# Altium PCB FinalPCB.PcbDoc (part 2 of 4)
Units mm, origin at the board's own origin, x right, y up, seen from the top; angles counter-clockwise.
Board outline 693.67 x 556.39 mm, 2 copper layers (Top Layer, Bottom Layer); 54 components, 53 nets, 276 pads, 0 vias.
Unrouted connection lines stored in the file: 5.
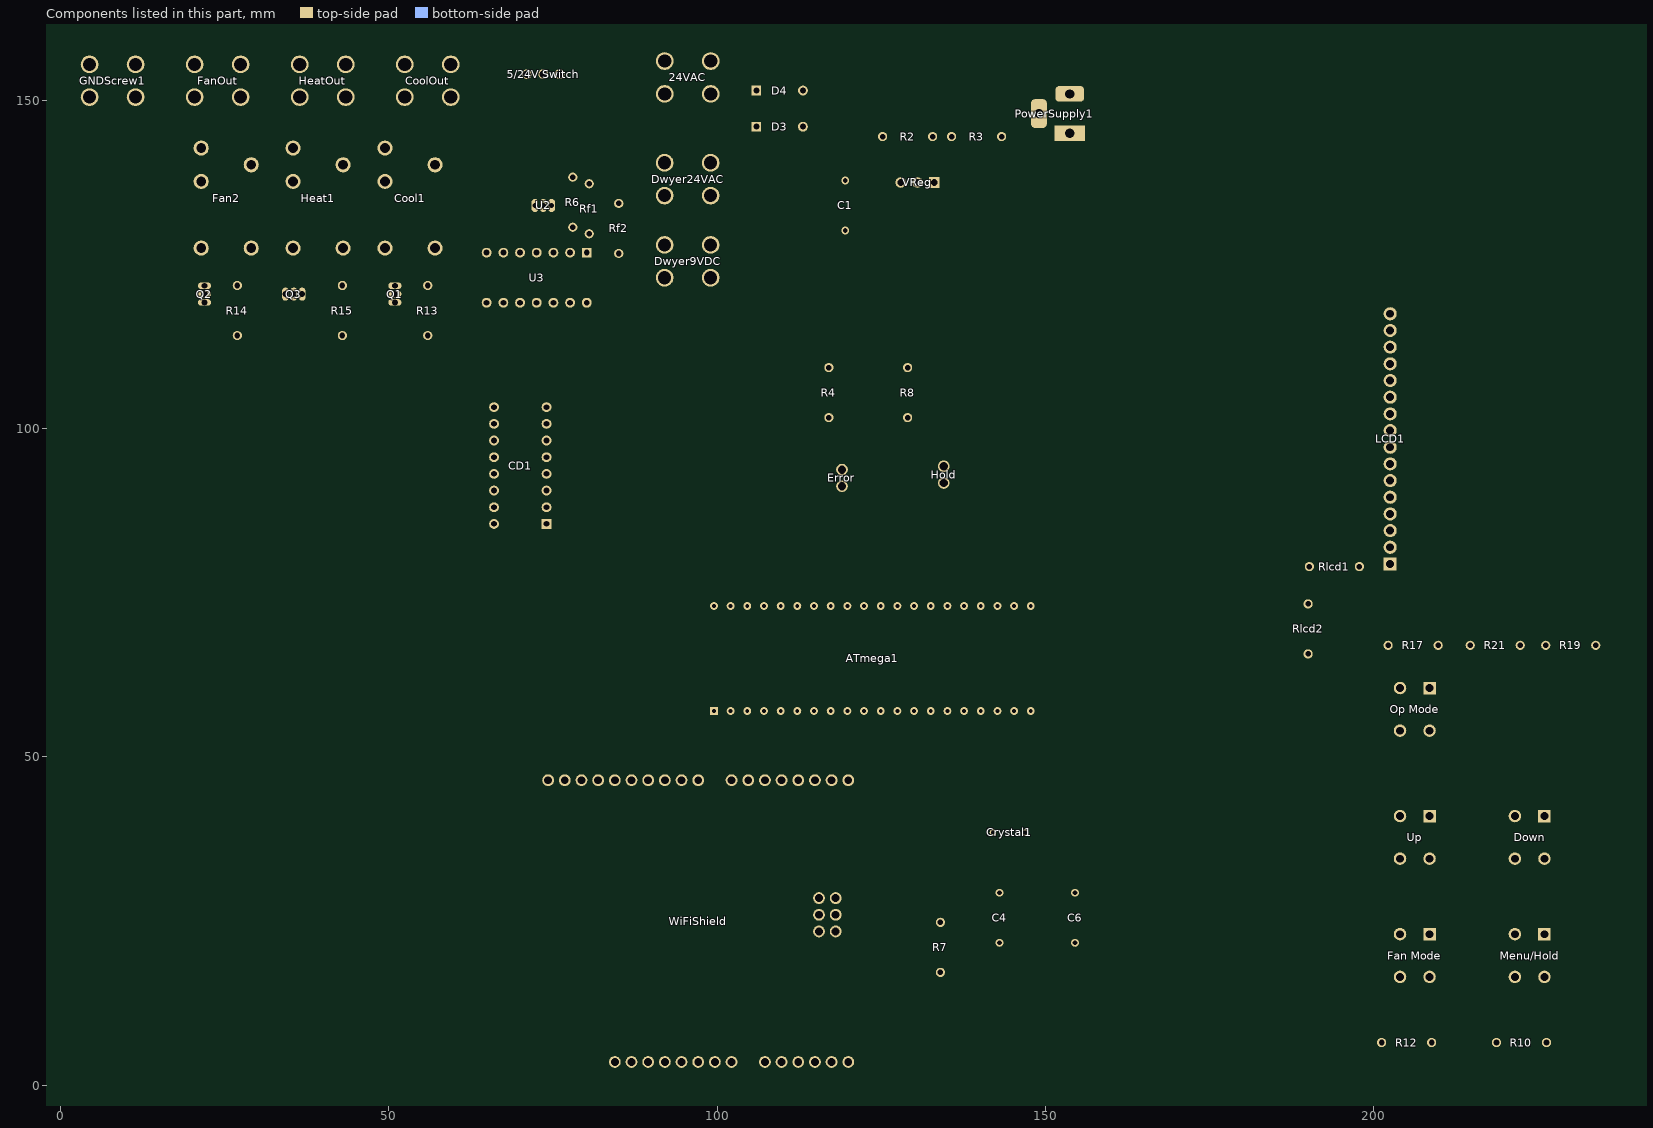
[diagram p2: the components of this part, seen from the top]

## Nets (pads, with @x,y where several pads share a name; then routed paths per layer and width w, separated by ;. In a path a pad name is that pad's centre, name@x,y a point inside that pad or via, vN(x,y) a via of type N, cw(c..) or ccw(c..) an arc to the next point about the centre after c; other vN are vias at no path point) (continued)
copper on no net: (continued)
  Top Layer w0.025: 148.793,113.624 148.793,116.215 ; 148.818,113.624 148.818,116.215 ; 148.843,113.624 148.843,116.215 ; 148.869,113.624 148.869,116.215 ; 148.894,113.624 148.894,116.215 ; 148.92,113.624 148.92,116.215 ; 148.945,113.624 148.945,116.215 ; 148.97,113.624 148.97,116.215 ; 148.996,113.624 148.996,116.215 ; 149.021,113.624 149.021,116.215 ; 149.047,113.624 149.047,116.215 ; 149.072,113.624 149.072,116.215 ; 149.097,113.624 149.097,116.215 ; 149.123,113.624 149.123,116.215 ; 149.123,130.109 149.123,130.414 ; 149.148,113.624 149.148,116.215 ; 149.148,130.109 149.148,130.414 ; 149.174,113.624 149.174,116.215 ; 149.174,130.109 149.174,130.414 ; 149.199,113.624 149.199,116.215 ; 149.199,130.109 149.199,130.414 ; 149.224,113.624 149.224,116.215 ; 149.224,130.109 149.224,130.414 ; 149.25,113.624 149.25,116.215 ; 149.25,130.109 149.25,130.414 ; 149.275,113.624 149.275,116.215 ; 149.275,130.109 149.275,130.414 ; 149.301,113.624 149.301,116.215 ; 149.301,130.109 149.301,130.414 ; 149.326,113.624 149.326,116.215 ; 149.326,130.109 149.326,130.414 ; 149.351,113.624 149.351,116.215 ; 149.351,130.109 149.351,130.414 ; 149.377,113.624 149.377,116.215 ; 149.377,130.109 149.377,130.414 ; 149.402,113.624 149.402,116.215 ; 149.402,130.109 149.402,130.414 ; 149.428,113.624 149.428,116.215 ; 149.428,130.109 149.428,130.414 ; 149.453,113.624 149.453,116.215 ; 149.453,130.109 149.453,130.414 ; 149.478,113.624 149.478,116.215 ; 149.478,130.109 149.478,130.414 ; 149.504,113.624 149.504,116.215 ; 149.504,130.109 149.504,130.414 ; 149.529,113.624 149.529,116.215 ; 149.529,120.482 149.529,120.889 ; 149.529,121.879 149.529,122.565 ; 149.529,124.749 149.529,125.359 ; 149.529,130.109 149.529,130.82 ; 149.555,113.624 149.555,116.215 ; 149.555,120.482 149.555,120.889 ; 149.555,121.879 149.555,122.565 ; 149.555,124.749 149.555,125.359 ; 149.555,130.109 149.555,130.82 ; 149.58,113.624 149.58,116.215 ; 149.58,120.482 149.58,120.889 ; 149.58,121.879 149.58,122.565 ; 149.58,124.749 149.58,125.359 ; 149.58,130.109 149.58,130.82 ; 149.605,113.624 149.605,116.215 ; 149.605,120.482 149.605,120.889 ; 149.605,121.879 149.605,122.565 ; 149.605,124.749 149.605,125.359 ; 149.605,130.109 149.605,130.82 ; 149.631,113.624 149.631,116.215 ; 149.631,120.482 149.631,120.889 ; 149.631,121.879 149.631,122.565 ; 149.631,124.749 149.631,125.359 ; 149.631,130.109 149.631,130.82 ; 149.656,113.624 149.656,114.513 ; 149.656,115.326 149.656,116.215 ; 149.656,120.482 149.656,120.889 ; 149.656,121.879 149.656,122.565 ; 149.656,124.749 149.656,125.359 ; 149.656,125.74 149.656,126.248 ; 149.656,130.109 149.656,130.82 ; 149.682,113.624 149.682,114.513 ; 149.682,115.326 149.682,116.215 ; 149.682,120.482 149.682,120.889 ; 149.682,121.879 149.682,122.565 ; 149.682,124.749 149.682,125.359 ; 149.682,125.74 149.682,126.248 ; 149.682,130.109 149.682,130.82 ; 149.707,113.624 149.707,114.513 ; 149.707,115.326 149.707,116.215 ; 149.707,120.482 149.707,120.889 ; 149.707,121.879 149.707,122.565 ; 149.707,124.749 149.707,125.359 ; 149.707,125.74 149.707,126.248 ; 149.707,130.109 149.707,130.82 ; 149.732,113.624 149.732,114.513 ; 149.732,115.326 149.732,116.215 ; 149.732,120.482 149.732,120.889 ; 149.732,121.879 149.732,122.565 ; 149.732,124.749 149.732,125.359 ; 149.732,125.74 149.732,126.248 ; 149.732,130.109 149.732,130.82 ; 149.758,113.624 149.758,114.513 ; 149.758,115.326 149.758,116.215 ; 149.758,120.482 149.758,120.889 ; 149.758,121.879 149.758,122.565 ; 149.758,124.749 149.758,125.359 ; 149.758,125.74 149.758,126.248 ; 149.758,130.109 149.758,130.82 ; 149.783,113.624 149.783,114.513 ; 149.783,115.326 149.783,116.215 ; 149.783,120.482 149.783,120.889 ; 149.783,121.879 149.783,122.565 ; 149.783,124.749 149.783,125.359 ; 149.783,125.74 149.783,126.248 ; 149.783,130.109 149.783,130.82 ; 149.809,113.624 149.809,114.513 ; 149.809,115.326 149.809,116.215 ; 149.809,120.482 149.809,120.889 ; 149.809,121.879 149.809,122.565 ; 149.809,124.749 149.809,125.359 ; 149.809,125.74 149.809,126.248 ; 149.809,130.109 149.809,130.82 ; 149.834,113.624 149.834,114.513 ; 149.834,115.326 149.834,116.215 ; 149.834,120.482 149.834,120.889 ; 149.834,121.879 149.834,122.565 ; 149.834,124.749 149.834,125.359 ; 149.834,125.74 149.834,126.248 ; 149.834,130.109 149.834,130.82 ; 149.859,113.624 149.859,114.513 ; 149.859,115.326 149.859,116.215 ; 149.859,120.482 149.859,120.889 ; 149.859,121.879 149.859,122.565 ; 149.859,124.749 149.859,125.359 ; 149.859,125.74 149.859,126.248 ; 149.859,130.109 149.859,130.82 ; 149.885,113.624 149.885,114.513 ; 149.885,115.326 149.885,116.215 ; 149.885,120.482 149.885,120.889 ; 149.885,121.879 149.885,122.565 ; 149.885,124.749 149.885,125.359 ; 149.885,125.74 149.885,126.248 ; 149.885,130.109 149.885,130.82 ; 149.91,113.624 149.91,114.513 ; 149.91,115.326 149.91,116.215 ; 149.91,120.482 149.91,120.889 ; 149.91,121.879 149.91,122.565 ; 149.91,124.749 149.91,125.359 ; 149.91,125.74 149.91,126.248 ; 149.91,130.109 149.91,130.82 ; 149.936,113.624 149.936,114.513 ; 149.936,115.326 149.936,116.215 ; 149.936,120.482 149.936,120.889 ; 149.936,121.879 149.936,122.565 ; 149.936,124.749 149.936,125.359 ; 149.936,125.74 149.936,126.248 ; 149.936,130.109 149.936,130.82 ; 149.961,113.624 149.961,114.513 ; 149.961,115.326 149.961,116.215 ; 149.961,120.482 149.961,120.889 ; 149.961,121.879 149.961,122.565 ; 149.961,124.749 149.961,125.359 ; 149.961,125.74 149.961,126.248 ; 149.961,130.109 149.961,130.82 ; 149.986,113.624 149.986,114.513 ; 149.986,115.326 149.986,116.215 ; 149.986,120.482 149.986,120.889 ; 149.986,121.879 149.986,122.565 ; 149.986,124.749 149.986,125.359 ; 149.986,125.74 149.986,126.248 ; 149.986,130.109 149.986,130.82 ; 150.012,113.624 150.012,114.513 ; 150.012,115.326 150.012,116.215 ; 150.012,120.482 150.012,120.889 ; 150.012,121.879 150.012,122.565 ; 150.012,124.749 150.012,125.359 ; 150.012,125.74 150.012,126.248 ; 150.012,130.109 150.012,130.82 ; 150.037,113.624 150.037,114.513 ; 150.037,115.326 150.037,116.215 ; 150.037,120.482 150.037,120.889 ; 150.037,121.879 150.037,122.565 ; 150.037,124.749 150.037,125.359 ; 150.037,125.74 150.037,126.248 ; 150.037,130.109 150.037,130.82 ; 150.063,113.624 150.063,114.513 ; 150.063,115.326 150.063,116.215 ; 150.063,120.482 150.063,120.889 ; 150.063,121.879 150.063,122.565 ; 150.063,124.749 150.063,125.359 ; 150.063,125.74 150.063,126.248 ; 150.063,130.109 150.063,130.82 ; 150.088,113.624 150.088,114.513 ; 150.088,115.326 150.088,116.215 ; 150.088,120.482 150.088,120.889 ; 150.088,121.879 150.088,122.565 ; 150.088,124.749 150.088,125.359 ; 150.088,125.74 150.088,126.248 ; 150.088,130.109 150.088,130.82 ; 150.113,113.624 150.113,114.513 ; 150.113,115.326 150.113,116.215 ; 150.113,120.482 150.113,120.889 ; 150.113,121.879 150.113,122.565 ; 150.113,124.749 150.113,125.359 ; 150.113,125.74 150.113,126.248 ; 150.113,130.109 150.113,130.82 ; 150.139,113.624 150.139,114.513 ; 150.139,115.326 150.139,116.215 ; 150.139,120.482 150.139,120.889 ; 150.139,121.879 150.139,122.565 ; 150.139,124.749 150.139,125.359 ; 150.139,125.74 150.139,126.248 ; 150.139,130.109 150.139,130.82 ; 150.164,113.624 150.164,114.513 ; 150.164,115.326 150.164,116.215 ; 150.164,120.482 150.164,120.889 ; 150.164,121.879 150.164,122.565 ; 150.164,124.749 150.164,125.359 ; 150.164,125.74 150.164,126.248 ; 150.164,130.109 150.164,130.82 ; 150.19,113.624 150.19,114.513 ; 150.19,115.326 150.19,116.215 ; 150.19,120.482 150.19,120.889 ; 150.19,121.879 150.19,122.565 ; 150.19,125.74 150.19,126.248 ; 150.19,130.109 150.19,130.82 ; 150.215,113.624 150.215,114.513 ; 150.215,115.326 150.215,116.215 ; 150.215,120.482 150.215,120.889 ; 150.215,121.879 150.215,122.565 ; 150.215,125.74 150.215,126.248 ; 150.215,130.109 150.215,130.82 ; 150.24,113.624 150.24,114.513 ; 150.24,115.326 150.24,116.215 ; 150.24,120.482 150.24,120.889 ; 150.24,121.879 150.24,122.565 ; 150.24,125.74 150.24,126.248 ; 150.24,130.109 150.24,130.82 ; 150.266,113.624 150.266,114.513 ; 150.266,115.326 150.266,116.215 ; 150.266,120.482 150.266,120.889 ; 150.266,121.879 150.266,122.565 ; 150.266,125.74 150.266,126.248 ; 150.266,130.109 150.266,130.82 ; 150.291,113.624 150.291,114.513 ; 150.291,115.326 150.291,116.215 ; 150.291,120.482 150.291,120.889 ; 150.291,121.879 150.291,122.565 ; 150.291,125.74 150.291,126.248 ; 150.291,130.109 150.291,130.82 ; 150.317,113.624 150.317,114.513 ; 150.317,115.326 150.317,116.215 ; 150.317,120.482 150.317,120.889 ; 150.317,121.879 150.317,122.565 ; 150.317,125.74 150.317,126.248 ; 150.317,130.109 150.317,130.82 ; 150.342,113.624 150.342,114.513 ; 150.342,115.326 150.342,116.215 ; 150.342,120.482 150.342,120.889 ; 150.342,121.879 150.342,122.565 ; 150.342,125.74 150.342,126.248 ; 150.342,130.109 150.342,130.82 ; 150.367,113.624 150.367,114.513 ; 150.367,115.326 150.367,116.215 ; 150.367,120.482 150.367,120.889 ; 150.367,121.879 150.367,122.565 ; 150.367,125.74 150.367,126.248 ; 150.367,130.109 150.367,130.82 ; 150.393,113.624 150.393,114.513 ; 150.393,115.326 150.393,116.215 ; 150.393,120.482 150.393,120.889 ; 150.393,121.879 150.393,122.565 ; 150.393,125.74 150.393,126.248 ; 150.393,130.109 150.393,130.82 ; 150.418,113.624 150.418,114.513 ; 150.418,115.326 150.418,116.215 ; 150.418,120.482 150.418,120.889 ; 150.418,121.879 150.418,122.565 ; 150.418,125.74 150.418,126.248 ; 150.418,130.109 150.418,130.82 ; 150.444,113.624 150.444,114.513 ; 150.444,115.326 150.444,116.215 ; 150.444,120.482 150.444,120.889 ; 150.444,121.879 150.444,122.565 ; 150.444,125.74 150.444,126.248 ; 150.444,130.109 150.444,130.82 ; 150.469,113.624 150.469,114.513 ; 150.469,115.326 150.469,116.215 ; 150.469,120.482 150.469,120.889 ; 150.469,121.879 150.469,122.565 ; 150.469,125.74 150.469,126.248 ; 150.469,130.109 150.469,130.82 ; 150.494,113.624 150.494,114.513 ; 150.494,115.326 150.494,116.215 ; 150.494,120.482 150.494,120.889 ; 150.494,121.879 150.494,122.565 ; 150.494,125.74 150.494,126.248 ; 150.494,130.109 150.494,130.82 ; 150.52,113.624 150.52,114.513 ; 150.52,115.326 150.52,116.215 ; 150.52,120.482 150.52,120.889 ; 150.52,121.879 150.52,122.565 ; 150.52,122.87 150.52,124.368 ; 150.52,124.749 150.52,125.359 ; 150.52,125.638 150.52,126.934 ; 150.52,127.137 150.52,128.229 ; 150.52,129.118 150.52,130.82 ; 150.545,113.624 150.545,114.513 ; 150.545,115.326 150.545,116.215 ; 150.545,120.482 150.545,120.889 ; 150.545,121.879 150.545,122.565 ; 150.545,122.87 150.545,124.368 ; 150.545,124.749 150.545,125.359 ; 150.545,125.638 150.545,126.934 ; 150.545,127.137 150.545,128.229 ; 150.545,129.118 150.545,130.82 ; 150.571,113.624 150.571,114.513 ; 150.571,115.326 150.571,116.215 ; 150.571,120.482 150.571,120.889 ; 150.571,121.879 150.571,122.565 ; 150.571,122.87 150.571,124.368 ; 150.571,124.749 150.571,125.359 ; 150.571,125.638 150.571,126.934 ; 150.571,127.137 150.571,128.229 ; 150.571,129.118 150.571,130.82 ; 150.596,113.624 150.596,114.513 ; 150.596,115.326 150.596,116.215 ; 150.596,120.482 150.596,120.889 ; 150.596,121.879 150.596,122.565 ; 150.596,122.87 150.596,124.368 ; 150.596,124.749 150.596,125.359 ; 150.596,125.638 150.596,126.934 ; 150.596,127.137 150.596,128.229 ; 150.596,129.118 150.596,130.82 ; 150.621,113.624 150.621,114.513 ; 150.621,115.326 150.621,116.215 ; 150.621,120.482 150.621,120.889 ; 150.621,121.879 150.621,122.565 ; 150.621,122.87 150.621,124.368 ; 150.621,124.749 150.621,125.359 ; 150.621,125.638 150.621,126.934 ; 150.621,127.137 150.621,128.229 ; 150.621,129.118 150.621,130.82 ; 150.647,113.624 150.647,114.513 ; 150.647,115.326 150.647,116.215 ; 150.647,120.482 150.647,120.889 ; 150.647,121.879 150.647,122.565 ; 150.647,122.87 150.647,124.368 ; 150.647,124.749 150.647,125.359 ; 150.647,125.638 150.647,126.934 ; 150.647,127.137 150.647,128.229 ; 150.647,129.118 150.647,130.82 ; 150.672,113.624 150.672,114.513 ; 150.672,115.326 150.672,116.215 ; 150.672,120.482 150.672,120.889 ; 150.672,121.879 150.672,122.565 ; 150.672,122.87 150.672,124.368 ; 150.672,124.749 150.672,125.359 ; 150.672,125.638 150.672,126.934 ; 150.672,127.137 150.672,128.229 ; 150.672,129.118 150.672,130.82 ; 150.698,113.624 150.698,114.513 ; 150.698,115.326 150.698,116.215 ; 150.698,120.482 150.698,120.889 ; 150.698,121.879 150.698,122.565 ; 150.698,122.87 150.698,124.368 ; 150.698,124.749 150.698,125.359 ; 150.698,125.638 150.698,126.934 ; 150.698,127.137 150.698,128.229 ; 150.698,129.118 150.698,130.82 ; 150.723,113.624 150.723,114.513 ; 150.723,115.326 150.723,116.215 ; 150.723,120.482 150.723,120.889 ; 150.723,121.879 150.723,122.565 ; 150.723,122.87 150.723,124.368 ; 150.723,124.749 150.723,125.359 ; 150.723,125.638 150.723,126.934 ; 150.723,127.137 150.723,128.229 ; 150.723,129.118 150.723,130.82 ; 150.748,113.624 150.748,114.513 ; 150.748,115.326 150.748,116.215 ; 150.748,120.482 150.748,120.889 ; 150.748,121.879 150.748,122.565 ; 150.748,122.87 150.748,124.368 ; 150.748,124.749 150.748,125.359 ; 150.748,125.638 150.748,126.934 ; 150.748,127.137 150.748,128.229 ; 150.748,129.118 150.748,130.82 ; 150.774,113.624 150.774,114.513 ; 150.774,115.326 150.774,116.215 ; 150.774,120.482 150.774,120.889 ; 150.774,121.879 150.774,122.565 ; 150.774,122.87 150.774,124.368 ; 150.774,124.749 150.774,125.359 ; 150.774,125.638 150.774,126.934 ; 150.774,127.137 150.774,128.229 ; 150.774,129.118 150.774,130.82 ; 150.799,113.624 150.799,114.513 ; 150.799,115.326 150.799,116.215 ; 150.799,120.482 150.799,120.889 ; 150.799,121.879 150.799,122.565 ; 150.799,122.87 150.799,124.368 ; 150.799,124.749 150.799,125.359 ; 150.799,125.638 150.799,126.934 ; 150.799,127.137 150.799,128.229 ; 150.799,129.118 150.799,130.82 ; 150.825,113.624 150.825,114.513 ; 150.825,115.326 150.825,116.215 ; 150.825,120.482 150.825,120.889 ; 150.825,121.879 150.825,122.565 ; 150.825,122.87 150.825,123.175 ; 150.825,123.962 150.825,124.368 ; 150.825,124.749 150.825,125.359 ; 150.825,125.74 150.825,126.248 ; 150.825,127.035 150.825,127.442 ; 150.825,128.026 150.825,128.432 ; 150.825,128.839 150.825,129.626 ; 150.825,129.931 150.825,130.82 ; 150.85,113.624 150.85,114.513 ; 150.85,115.326 150.85,116.215 ; 150.85,120.482 150.85,120.889 ; 150.85,121.879 150.85,122.565 ; 150.85,122.87 150.85,123.175 ; 150.85,123.962 150.85,124.368 ; 150.85,124.749 150.85,125.359 ; 150.85,125.74 150.85,126.248 ; 150.85,127.035 150.85,127.442 ; 150.85,128.026 150.85,128.432 ; 150.85,128.839 150.85,129.626 ; 150.85,129.931 150.85,130.82 ; 150.875,113.624 150.875,114.513 ; 150.875,115.326 150.875,116.215 ; 150.875,120.482 150.875,120.889 ; 150.875,121.879 150.875,122.565 ; 150.875,122.87 150.875,123.175 ; 150.875,123.962 150.875,124.368 ; 150.875,124.749 150.875,125.359 ; 150.875,125.74 150.875,126.248 ; 150.875,127.035 150.875,127.442 ; 150.875,128.026 150.875,128.432 ; 150.875,128.839 150.875,129.626 ; 150.875,129.931 150.875,130.82 ; 150.901,113.624 150.901,114.513 ; 150.901,115.326 150.901,116.215 ; 150.901,120.482 150.901,120.889 ; 150.901,121.879 150.901,122.565 ; 150.901,122.87 150.901,123.175 ; 150.901,123.962 150.901,124.368 ; 150.901,124.749 150.901,125.359 ; 150.901,125.74 150.901,126.248 ; 150.901,127.035 150.901,127.442 ; 150.901,128.026 150.901,128.432 ; 150.901,128.839 150.901,129.626 ; 150.901,129.931 150.901,130.82 ; 150.926,113.624 150.926,114.513 ; 150.926,115.326 150.926,116.215 ; 150.926,120.482 150.926,120.889 ; 150.926,121.879 150.926,122.565 ; 150.926,122.87 150.926,123.175 ; 150.926,123.962 150.926,124.368 ; 150.926,124.749 150.926,125.359 ; 150.926,125.74 150.926,126.248 ; 150.926,127.035 150.926,127.442 ; 150.926,128.026 150.926,128.432 ; 150.926,128.839 150.926,129.626 ; 150.926,129.931 150.926,130.82 ; 150.952,113.624 150.952,114.513 ; 150.952,115.326 150.952,116.215 ; 150.952,120.482 150.952,120.889 ; 150.952,121.879 150.952,122.565 ; 150.952,122.87 150.952,123.175 ; 150.952,123.962 150.952,124.368 ; 150.952,124.749 150.952,125.359 ; 150.952,125.74 150.952,126.248 ; 150.952,127.035 150.952,127.442 ; 150.952,128.026 150.952,128.432 ; 150.952,128.839 150.952,129.626 ; 150.952,129.931 150.952,130.82 ; 150.977,113.624 150.977,114.513 ; 150.977,115.326 150.977,116.215 ; 150.977,120.482 150.977,120.889 ; 150.977,121.879 150.977,122.565 ; 150.977,122.87 150.977,123.175 ; 150.977,123.962 150.977,124.368 ; 150.977,124.749 150.977,125.359 ; 150.977,125.74 150.977,126.248 ; 150.977,127.035 150.977,127.442 ; 150.977,128.026 150.977,128.432 ; 150.977,128.839 150.977,129.626 ; 150.977,129.931 150.977,130.82 ; 151.002,113.624 151.002,114.513 ; 151.002,115.326 151.002,116.215 ; 151.002,120.482 151.002,120.889 ; 151.002,121.879 151.002,122.565 ; 151.002,122.87 151.002,123.175 ; 151.002,123.962 151.002,124.368 ; 151.002,124.749 151.002,125.359 ; 151.002,125.74 151.002,126.248 ; 151.002,127.035 151.002,127.442 ; 151.002,128.026 151.002,128.432 ; 151.002,128.839 151.002,129.626 ; 151.002,129.931 151.002,130.82 ; 151.028,113.624 151.028,114.513 ; 151.028,115.326 151.028,116.215 ; 151.028,120.482 151.028,120.889 ; 151.028,121.879 151.028,122.565 ; 151.028,122.87 151.028,123.175 ; 151.028,123.962 151.028,124.368 ; 151.028,124.749 151.028,125.359 ; 151.028,125.74 151.028,126.248 ; 151.028,127.035 151.028,127.442 ; 151.028,128.026 151.028,128.432 ; 151.028,128.839 151.028,129.626 ; 151.028,129.931 151.028,130.82 ; 151.053,113.624 151.053,114.513 ; 151.053,115.326 151.053,116.215 ; 151.053,120.482 151.053,120.889 ; 151.053,121.879 151.053,122.565 ; 151.053,122.87 151.053,123.175 ; 151.053,123.962 151.053,124.368 ; 151.053,124.749 151.053,125.359 ; 151.053,125.74 151.053,126.248 ; 151.053,127.035 151.053,127.442 ; 151.053,128.026 151.053,128.432 ; 151.053,128.839 151.053,129.626 ; 151.053,129.931 151.053,130.82 ; 151.079,113.624 151.079,114.513 ; 151.079,115.326 151.079,116.215 ; 151.079,120.482 151.079,120.889 ; 151.079,121.879 151.079,122.565 ; 151.079,122.87 151.079,123.175 ; 151.079,123.962 151.079,124.368 ; 151.079,124.749 151.079,125.359 ; 151.079,125.74 151.079,126.248 ; 151.079,127.035 151.079,127.442 ; 151.079,128.026 151.079,128.432 ; 151.079,128.839 151.079,129.626 ; 151.079,129.931 151.079,130.82 ; 151.104,113.624 151.104,114.513 ; 151.104,115.326 151.104,116.215 ; 151.104,120.482 151.104,120.889 ; 151.104,121.879 151.104,122.565 ; 151.104,122.87 151.104,123.175 ; 151.104,123.962 151.104,124.368 ; 151.104,124.749 151.104,125.359 ; 151.104,125.74 151.104,126.248 ; 151.104,127.035 151.104,127.442 ; 151.104,128.026 151.104,128.432 ; 151.104,128.839 151.104,129.626 ; 151.104,129.931 151.104,130.82 ; 151.129,113.624 151.129,114.513 ; 151.129,115.326 151.129,116.215 ; 151.129,120.482 151.129,120.889 ; 151.129,121.879 151.129,122.565 ; 151.129,122.87 151.129,123.175 ; 151.129,123.962 151.129,124.368 ; 151.129,124.749 151.129,125.359 ; 151.129,125.74 151.129,126.248 ; 151.129,127.035 151.129,127.442 ; 151.129,128.026 151.129,128.432 ; 151.129,128.839 151.129,129.626 ; 151.129,129.931 151.129,130.82 ; 151.155,113.624 151.155,114.513 ; 151.155,115.326 151.155,116.215 ; 151.155,120.482 151.155,120.889 ; 151.155,121.879 151.155,122.565 ; 151.155,122.87 151.155,123.175 ; 151.155,123.962 151.155,124.368 ; 151.155,124.749 151.155,125.359 ; 151.155,125.74 151.155,126.248 ; 151.155,127.035 151.155,127.442 ; 151.155,128.026 151.155,128.432 ; 151.155,128.839 151.155,129.626 ; 151.155,129.931 151.155,130.82 ; 151.18,113.624 151.18,114.513 ; 151.18,115.326 151.18,116.215 ; 151.18,120.482 151.18,120.889 ; 151.18,121.879 151.18,122.565 ; 151.18,122.87 151.18,123.175 ; 151.18,123.962 151.18,124.368 ; 151.18,124.749 151.18,125.359 ; 151.18,125.74 151.18,126.248 ; 151.18,127.035 151.18,127.442 ; 151.18,128.026 151.18,128.432 ; 151.18,128.839 151.18,129.626 ; 151.18,129.931 151.18,130.82 ; 151.206,113.624 151.206,114.513 ; 151.206,115.326 151.206,116.215 ; 151.206,120.482 151.206,120.889 ; 151.206,121.879 151.206,122.565 ; 151.206,122.87 151.206,123.175 ; 151.206,123.962 151.206,124.368 ; 151.206,124.749 151.206,125.359 ; 151.206,125.74 151.206,126.248 ; 151.206,127.035 151.206,127.442 ; 151.206,128.026 151.206,128.432 ; 151.206,128.839 151.206,129.626 ; 151.206,129.931 151.206,130.82 ; 151.231,113.624 151.231,114.513 ; 151.231,115.326 151.231,116.215 ; 151.231,120.482 151.231,120.889 ; 151.231,121.879 151.231,122.565 ; 151.231,122.87 151.231,123.175 ; 151.231,123.962 151.231,124.368 ; 151.231,124.749 151.231,125.359 ; 151.231,125.74 151.231,126.248 ; 151.231,127.035 151.231,127.442 ; 151.231,128.026 151.231,128.432 ; 151.231,128.839 151.231,129.626 ; 151.231,129.931 151.231,130.82 ; 151.256,113.624 151.256,114.513 ; 151.256,115.326 151.256,116.215 ; 151.256,120.482 151.256,120.889 ; 151.256,121.879 151.256,122.565 ; 151.256,122.87 151.256,123.175 ; 151.256,123.962 151.256,124.368 ; 151.256,124.749 151.256,125.359 ; 151.256,125.74 151.256,126.248 ; 151.256,127.035 151.256,127.137 ; 151.256,128.229 151.256,128.432 ; 151.256,128.839 151.256,129.626 ; 151.256,130.109 151.256,130.82 ; 151.282,113.624 151.282,114.513 ; 151.282,115.326 151.282,116.215 ; 151.282,120.482 151.282,120.889 ; 151.282,121.879 151.282,122.565 ; 151.282,122.87 151.282,123.175 ; 151.282,123.962 151.282,124.368 ; 151.282,124.749 151.282,125.359 ; 151.282,125.74 151.282,126.248 ; 151.282,127.035 151.282,127.137 ; 151.282,128.229 151.282,128.432 ; 151.282,128.839 151.282,129.626 ; 151.282,130.109 151.282,130.82 ; 151.307,113.624 151.307,114.513 ; 151.307,115.326 151.307,116.215 ; 151.307,120.482 151.307,120.889 ; 151.307,121.879 151.307,122.565 ; 151.307,122.87 151.307,123.175 ; 151.307,123.962 151.307,124.368 ; 151.307,124.749 151.307,125.359 ; 151.307,125.74 151.307,126.248 ; 151.307,127.035 151.307,127.137 ; 151.307,128.229 151.307,128.432 ; 151.307,128.839 151.307,129.626 ; 151.307,130.109 151.307,130.82 ; 151.333,113.624 151.333,114.513 ; 151.333,115.326 151.333,116.215 ; 151.333,120.482 151.333,120.889 ; 151.333,121.879 151.333,122.565 ; 151.333,122.87 151.333,123.175 ; 151.333,123.962 151.333,124.368 ; 151.333,124.749 151.333,125.359 ; 151.333,125.74 151.333,126.248 ; 151.333,127.035 151.333,127.137 ; 151.333,128.229 151.333,128.432 ; 151.333,128.839 151.333,129.626 ; 151.333,130.109 151.333,130.82 ; 151.358,113.624 151.358,114.513 ; 151.358,115.326 151.358,116.215 ; 151.358,120.482 151.358,120.889 ; 151.358,121.879 151.358,122.565 ; 151.358,122.87 151.358,123.175 ; 151.358,123.962 151.358,124.368 ; 151.358,124.749 151.358,125.359 ; 151.358,125.74 151.358,126.248 ; 151.358,127.035 151.358,127.137 ; 151.358,128.229 151.358,128.432 ; 151.358,128.839 151.358,129.626 ; 151.358,130.109 151.358,130.82 ; 151.383,113.624 151.383,114.513 ; 151.383,115.326 151.383,116.215 ; 151.383,120.482 151.383,120.889 ; 151.383,121.879 151.383,122.565 ; 151.383,122.87 151.383,123.175 ; 151.383,123.962 151.383,124.368 ; 151.383,124.749 151.383,125.359 ; 151.383,125.74 151.383,126.248 ; 151.383,127.035 151.383,127.137 ; 151.383,128.229 151.383,128.432 ; 151.383,128.839 151.383,129.626 ; 151.383,130.109 151.383,130.82 ; 151.409,113.624 151.409,114.513 ; 151.409,115.326 151.409,116.215 ; 151.409,120.482 151.409,120.889 ; 151.409,121.879 151.409,122.565 ; 151.409,122.87 151.409,123.175 ; 151.409,123.962 151.409,124.368 ; 151.409,124.749 151.409,125.359 ; 151.409,125.74 151.409,126.248 ; 151.409,127.035 151.409,127.137 ; 151.409,128.229 151.409,128.432 ; 151.409,128.839 151.409,129.626 ; 151.409,130.109 151.409,130.82 ; 151.434,113.624 151.434,114.513 ; 151.434,115.326 151.434,116.215 ; 151.434,120.482 151.434,120.889 ; 151.434,121.879 151.434,122.565 ; 151.434,122.87 151.434,123.175 ; 151.434,123.962 151.434,124.368 ; 151.434,124.749 151.434,125.359 ; 151.434,125.74 151.434,126.248 ; 151.434,127.035 151.434,127.137 ; 151.434,128.229 151.434,128.432 ; 151.434,128.839 151.434,129.626 ; 151.434,130.109 151.434,130.82 ; 151.46,113.624 151.46,114.513 ; 151.46,115.326 151.46,116.215 ; 151.46,120.482 151.46,120.889 ; 151.46,121.879 151.46,122.565 ; 151.46,122.87 151.46,123.175 ; 151.46,123.962 151.46,124.368 ; 151.46,124.749 151.46,125.359 ; 151.46,125.74 151.46,126.248 ; 151.46,127.035 151.46,127.137 ; 151.46,128.229 151.46,128.432 ; 151.46,128.839 151.46,129.626 ; 151.46,130.109 151.46,130.82 ; 151.485,113.624 151.485,114.513 ; 151.485,115.326 151.485,116.215 ; 151.485,120.482 151.485,120.889 ; 151.485,121.879 151.485,122.565 ; 151.485,122.87 151.485,123.175 ; 151.485,123.962 151.485,124.368 ; 151.485,124.749 151.485,125.359 ; 151.485,125.74 151.485,126.248 ; 151.485,127.035 151.485,127.137 ; 151.485,128.229 151.485,128.432 ; 151.485,128.839 151.485,129.626 ; 151.485,130.109 151.485,130.82 ; 151.51,113.624 151.51,114.513 ; 151.51,115.326 151.51,116.215 ; 151.51,120.482 151.51,120.889 ; 151.51,121.879 151.51,122.565 ; 151.51,122.87 151.51,123.175 ; 151.51,123.962 151.51,124.368 ; 151.51,124.749 151.51,125.359 ; 151.51,125.74 151.51,126.248 ; 151.51,127.035 151.51,127.137 ; 151.51,128.229 151.51,128.432 ; 151.51,128.839 151.51,129.626 ; 151.51,130.109 151.51,130.82 ; 151.536,113.624 151.536,114.513 ; 151.536,115.326 151.536,116.215 ; 151.536,120.482 151.536,120.889 ; 151.536,121.879 151.536,122.565 ; 151.536,122.87 151.536,123.175 ; 151.536,123.962 151.536,124.368 ; 151.536,124.749 151.536,125.359 ; 151.536,125.74 151.536,126.248 ; 151.536,127.035 151.536,127.137 ; 151.536,128.229 151.536,128.432 ; 151.536,128.839 151.536,129.626 ; 151.536,130.109 151.536,130.82 ; 151.561,113.624 151.561,114.513 ; 151.561,115.326 151.561,116.215 ; 151.561,120.482 151.561,120.889 ; 151.561,121.879 151.561,122.565 ; 151.561,122.87 151.561,123.175 ; 151.561,123.962 151.561,124.368 ; 151.561,124.749 151.561,125.359 ; 151.561,125.74 151.561,126.248 ; 151.561,127.035 151.561,127.137 ; 151.561,128.229 151.561,128.432 ; 151.561,128.839 151.561,129.626 ; 151.561,130.109 151.561,130.82 ; 151.587,113.624 151.587,114.513 ; 151.587,115.326 151.587,116.215 ; 151.587,120.482 151.587,120.889 ; 151.587,121.879 151.587,122.565 ; 151.587,122.87 151.587,123.175 ; 151.587,123.962 151.587,124.368 ; 151.587,124.749 151.587,125.359 ; 151.587,125.74 151.587,126.248 ; 151.587,126.934 151.587,128.432 ; 151.587,128.737 151.587,129.118 ; 151.587,130.109 151.587,130.82 ; 151.612,113.624 151.612,114.513 ; 151.612,115.326 151.612,116.215 ; 151.612,120.482 151.612,120.889 ; 151.612,121.879 151.612,122.565 ; 151.612,122.87 151.612,123.175 ; 151.612,123.962 151.612,124.368 ; 151.612,124.749 151.612,125.359 ; 151.612,125.74 151.612,126.248 ; 151.612,126.934 151.612,128.432 ; 151.612,128.737 151.612,129.118 ; 151.612,130.109 151.612,130.82 ; 151.637,113.624 151.637,114.513 ; 151.637,115.326 151.637,116.215 ; 151.637,120.482 151.637,120.889 ; 151.637,121.879 151.637,122.565 ; 151.637,122.87 151.637,123.175 ; 151.637,123.962 151.637,124.368 ; 151.637,124.749 151.637,125.359 ; 151.637,125.74 151.637,126.248 ; 151.637,126.934 151.637,128.432 ; 151.637,128.737 151.637,129.118 ; 151.637,130.109 151.637,130.82 ; 151.663,113.624 151.663,114.513 ; 151.663,115.326 151.663,116.215 ; 151.663,120.482 151.663,120.889 ; 151.663,121.879 151.663,122.565 ; 151.663,122.87 151.663,123.175 ; 151.663,123.962 151.663,124.368 ; 151.663,124.749 151.663,125.359 ; 151.663,125.74 151.663,126.248 ; 151.663,126.934 151.663,128.432 ; 151.663,128.737 151.663,129.118 ; 151.663,130.109 151.663,130.82 ; 151.688,113.624 151.688,114.513 ; 151.688,115.326 151.688,116.215 ; 151.688,120.482 151.688,120.889 ; 151.688,121.879 151.688,122.565 ; 151.688,122.87 151.688,123.175 ; 151.688,123.962 151.688,124.368 ; 151.688,124.749 151.688,125.359 ; 151.688,125.74 151.688,126.248 ; 151.688,126.934 151.688,128.432 ; 151.688,128.737 151.688,129.118 ; 151.688,130.109 151.688,130.82 ; 151.714,113.624 151.714,114.513 ; 151.714,115.326 151.714,116.215 ; 151.714,120.482 151.714,120.889 ; 151.714,121.879 151.714,122.565 ; 151.714,122.87 151.714,123.175 ; 151.714,123.962 151.714,124.368 ; 151.714,124.749 151.714,125.359 ; 151.714,125.74 151.714,126.248 ; 151.714,126.934 151.714,128.432 ; 151.714,128.737 151.714,129.118 ; 151.714,130.109 151.714,130.82 ; 151.739,113.624 151.739,114.513 ; 151.739,115.326 151.739,116.215 ; 151.739,120.482 151.739,120.889 ; 151.739,121.879 151.739,122.565 ; 151.739,122.87 151.739,123.175 ; 151.739,123.962 151.739,124.368 ; 151.739,124.749 151.739,125.359 ; 151.739,125.74 151.739,126.248 ; 151.739,126.934 151.739,128.432 ; 151.739,128.737 151.739,129.118 ; 151.739,130.109 151.739,130.82 ; 151.764,113.624 151.764,114.513 ; 151.764,115.326 151.764,116.215 ; 151.764,120.482 151.764,120.889 ; 151.764,121.879 151.764,122.565 ; 151.764,122.87 151.764,123.175 ; 151.764,123.962 151.764,124.368 ; 151.764,124.749 151.764,125.359 ; 151.764,125.74 151.764,126.248 ; 151.764,126.934 151.764,128.432 ; 151.764,128.737 151.764,129.118 ; 151.764,130.109 151.764,130.82 ; 151.79,113.624 151.79,114.513 ; 151.79,115.326 151.79,116.215 ; 151.79,120.482 151.79,120.889 ; 151.79,121.879 151.79,122.565 ; 151.79,122.87 151.79,123.175 ; 151.79,123.962 151.79,124.368 ; 151.79,124.749 151.79,125.359 ; 151.79,125.74 151.79,126.248 ; 151.79,126.934 151.79,127.137 ; 151.79,128.737 151.79,129.118 ; 151.79,130.109 151.79,130.82 ; 151.815,113.624 151.815,114.513 ; 151.815,115.326 151.815,116.215 ; 151.815,120.482 151.815,120.889 ; 151.815,121.879 151.815,122.565 ; 151.815,122.87 151.815,123.175 ; 151.815,123.962 151.815,124.368 ; 151.815,124.749 151.815,125.359 ; 151.815,125.74 151.815,126.248 ; 151.815,126.934 151.815,127.137 ; 151.815,128.737 151.815,129.118 ; 151.815,130.109 151.815,130.82 ; 151.841,113.624 151.841,114.513 ; 151.841,115.326 151.841,116.215 ; 151.841,120.482 151.841,120.889 ; 151.841,121.879 151.841,122.565 ; 151.841,122.87 151.841,123.175 ; 151.841,123.962 151.841,124.368 ; 151.841,124.749 151.841,125.359 ; 151.841,125.74 151.841,126.248 ; 151.841,126.934 151.841,127.137 ; 151.841,128.737 151.841,129.118 ; 151.841,130.109 151.841,130.82 ; 151.866,113.624 151.866,114.513 ; 151.866,115.326 151.866,116.215 ; 151.866,120.482 151.866,120.889 ; 151.866,121.879 151.866,122.565 ; 151.866,122.87 151.866,123.175 ; 151.866,123.962 151.866,124.368 ; 151.866,124.749 151.866,125.359 ; 151.866,125.74 151.866,126.248 ; 151.866,126.934 151.866,127.137 ; 151.866,128.737 151.866,129.118 ; 151.866,130.109 151.866,130.82 ; 151.891,113.624 151.891,114.513 ; 151.891,115.326 151.891,116.215 ; 151.891,120.482 151.891,120.889 ; 151.891,121.879 151.891,122.565 ; 151.891,122.87 151.891,123.175 ; 151.891,123.962 151.891,124.368 ; 151.891,124.749 151.891,125.359 ; 151.891,125.74 151.891,126.248 ; 151.891,126.934 151.891,127.137 ; 151.891,128.737 151.891,129.118 ; 151.891,130.109 151.891,130.82 ; 151.917,113.624 151.917,114.513 ; 151.917,115.326 151.917,116.215 ; 151.917,120.482 151.917,120.889 ; 151.917,121.879 151.917,122.565 ; 151.917,122.87 151.917,123.175 ; 151.917,123.962 151.917,124.368 ; 151.917,124.749 151.917,125.359 ; 151.917,125.74 151.917,126.248 ; 151.917,126.934 151.917,127.137 ; 151.917,128.737 151.917,129.118 ; 151.917,130.109 151.917,130.82 ; 151.942,113.624 151.942,114.513 ; 151.942,115.326 151.942,116.215 ; 151.942,120.482 151.942,120.889 ; 151.942,121.879 151.942,122.565 ; 151.942,122.87 151.942,123.175 ; 151.942,123.962 151.942,124.368 ; 151.942,124.749 151.942,125.359 ; 151.942,125.74 151.942,126.248 ; 151.942,126.934 151.942,127.137 ; 151.942,128.737 151.942,129.118 ; 151.942,130.109 151.942,130.82 ; 151.968,113.624 151.968,114.513 ; 151.968,115.326 151.968,116.215 ; 151.968,120.482 151.968,120.889 ; 151.968,121.879 151.968,122.565 ; 151.968,122.87 151.968,123.175 ; 151.968,123.962 151.968,124.368 ; 151.968,124.749 151.968,125.359 ; 151.968,125.74 151.968,126.248 ; 151.968,126.934 151.968,127.137 ; 151.968,128.737 151.968,129.118 ; 151.968,130.109 151.968,130.82 ; 151.993,113.624 151.993,114.513 ; 151.993,115.326 151.993,116.215 ; 151.993,120.482 151.993,120.889 ; 151.993,121.879 151.993,122.565 ; 151.993,122.87 151.993,123.175 ; 151.993,123.962 151.993,124.368 ; 151.993,124.749 151.993,125.359 ; 151.993,125.74 151.993,126.248 ; 151.993,126.934 151.993,127.137 ; 151.993,128.737 151.993,129.118 ; 151.993,130.109 151.993,130.82 ; 152.018,113.624 152.018,114.513 ; 152.018,115.326 152.018,116.215 ; 152.018,120.482 152.018,120.889 ; 152.018,121.879 152.018,122.565 ; 152.018,122.87 152.018,123.175 ; 152.018,123.962 152.018,124.368 ; 152.018,124.749 152.018,125.359 ; 152.018,125.74 152.018,126.248 ; 152.018,126.934 152.018,127.137 ; 152.018,128.737 152.018,129.118 ; 152.018,130.109 152.018,130.82 ; 152.044,113.624 152.044,114.513 ; 152.044,115.326 152.044,116.215 ; 152.044,120.482 152.044,120.889 ; 152.044,121.879 152.044,122.565 ; 152.044,122.87 152.044,123.175 ; 152.044,123.962 152.044,124.368 ; 152.044,124.749 152.044,125.359 ; 152.044,125.74 152.044,126.248 ; 152.044,126.934 152.044,127.137 ; 152.044,128.737 152.044,129.118 ; 152.044,130.109 152.044,130.82 ; 152.069,113.624 152.069,114.513 ; 152.069,115.326 152.069,116.215 ; 152.069,120.482 152.069,120.889 ; 152.069,121.879 152.069,122.565 ; 152.069,122.87 152.069,123.175 ; 152.069,123.962 152.069,124.368 ; 152.069,124.749 152.069,125.359 ; 152.069,125.74 152.069,126.248 ; 152.069,126.934 152.069,127.137 ; 152.069,128.737 152.069,129.118 ; 152.069,130.109 152.069,130.82 ; 152.095,113.624 152.095,114.513 ; 152.095,115.326 152.095,116.215 ; 152.095,120.482 152.095,120.889 ; 152.095,121.879 152.095,122.565 ; 152.095,122.87 152.095,123.175 ; 152.095,123.962 152.095,124.368 ; 152.095,124.749 152.095,125.359 ; 152.095,125.74 152.095,126.248 ; 152.095,126.934 152.095,127.137 ; 152.095,128.737 152.095,129.118 ; 152.095,130.109 152.095,130.82 ; 152.12,113.624 152.12,114.513 ; 152.12,115.326 152.12,116.215 ; 152.12,120.482 152.12,120.889 ; 152.12,121.879 152.12,122.565 ; 152.12,122.87 152.12,123.175 ; 152.12,123.962 152.12,124.368 ; 152.12,124.749 152.12,125.359 ; 152.12,125.74 152.12,126.248 ; 152.12,127.035 152.12,127.442 ; 152.12,128.839 152.12,129.626 ; 152.12,129.931 152.12,130.82 ; 152.145,113.624 152.145,114.513 ; 152.145,115.326 152.145,116.215 ; 152.145,120.482 152.145,120.889 ; 152.145,121.879 152.145,122.565 ; 152.145,122.87 152.145,123.175 ; 152.145,123.962 152.145,124.368 ; 152.145,124.749 152.145,125.359 ; 152.145,125.74 152.145,126.248 ; 152.145,127.035 152.145,127.442 ; 152.145,128.839 152.145,129.626 ; 152.145,129.931 152.145,130.82 ; 152.171,113.624 152.171,114.513 ; 152.171,115.326 152.171,116.215 ; 152.171,120.482 152.171,120.889 ; 152.171,121.879 152.171,122.565 ; 152.171,122.87 152.171,123.175 ; 152.171,123.962 152.171,124.368 ; 152.171,124.749 152.171,125.359 ; 152.171,125.74 152.171,126.248 ; 152.171,127.035 152.171,127.442 ; 152.171,128.839 152.171,129.626 ; 152.171,129.931 152.171,130.82 ; 152.196,113.624 152.196,114.513 ; 152.196,115.326 152.196,116.215 ; 152.196,120.482 152.196,120.889 ; 152.196,121.879 152.196,122.565 ; 152.196,122.87 152.196,123.175 ; 152.196,123.962 152.196,124.368 ; 152.196,124.749 152.196,125.359 ; 152.196,125.74 152.196,126.248 ; 152.196,127.035 152.196,127.442 ; 152.196,128.839 152.196,129.626 ; 152.196,129.931 152.196,130.82 ; 152.222,113.624 152.222,114.513 ; 152.222,115.326 152.222,116.215 ; 152.222,120.482 152.222,120.889 ; 152.222,121.879 152.222,122.565 ; 152.222,122.87 152.222,123.175 ; 152.222,123.962 152.222,124.368 ; 152.222,124.749 152.222,125.359 ; 152.222,125.74 152.222,126.248 ; 152.222,127.035 152.222,127.442 ; 152.222,128.839 152.222,129.626 ; 152.222,129.931 152.222,130.82 ; 152.247,113.624 152.247,114.513 ; 152.247,115.326 152.247,116.215 ; 152.247,120.482 152.247,120.889 ; 152.247,121.879 152.247,122.565 ; 152.247,122.87 152.247,123.175 ; 152.247,123.962 152.247,124.368 ; 152.247,124.749 152.247,125.359 ; 152.247,125.74 152.247,126.248 ; 152.247,127.035 152.247,127.442 ; 152.247,128.839 152.247,129.626 ; 152.247,129.931 152.247,130.82 ; 152.272,113.624 152.272,114.513 ; 152.272,115.326 152.272,116.215 ; 152.272,120.482 152.272,120.889 ; 152.272,121.879 152.272,122.565 ; 152.272,122.87 152.272,123.175 ; 152.272,123.962 152.272,124.368 ; 152.272,124.749 152.272,125.359 ; 152.272,125.74 152.272,126.248 ; 152.272,127.035 152.272,127.442 ; 152.272,128.839 152.272,129.626 ; 152.272,129.931 152.272,130.82 ; 152.298,113.624 152.298,114.513 ; 152.298,115.326 152.298,116.215 ; 152.298,120.482 152.298,120.889 ; 152.298,121.879 152.298,122.565 ; 152.298,122.87 152.298,123.175 ; 152.298,123.962 152.298,124.368 ; 152.298,124.749 152.298,125.359 ; 152.298,125.74 152.298,126.248 ; 152.298,127.035 152.298,127.442 ; 152.298,128.839 152.298,129.626 ; 152.298,129.931 152.298,130.82 ; 152.323,113.624 152.323,114.513 ; 152.323,115.326 152.323,116.215 ; 152.323,120.482 152.323,120.889 ; 152.323,121.879 152.323,122.565 ; 152.323,122.87 152.323,123.175 ; 152.323,123.962 152.323,124.368 ; 152.323,124.749 152.323,125.359 ; 152.323,125.74 152.323,126.248 ; 152.323,127.035 152.323,127.442 ; 152.323,128.839 152.323,129.626 ; 152.323,129.931 152.323,130.82 ; 152.349,113.624 152.349,114.513 ; 152.349,115.326 152.349,116.215 ; 152.349,120.482 152.349,120.889 ; 152.349,121.879 152.349,122.565 ; 152.349,122.87 152.349,123.175 ; 152.349,123.962 152.349,124.368 ; 152.349,124.749 152.349,125.359 ; 152.349,125.74 152.349,126.248 ; 152.349,127.035 152.349,127.442 ; 152.349,128.839 152.349,129.626 ; 152.349,129.931 152.349,130.82 ; 152.374,113.624 152.374,114.513 ; 152.374,115.326 152.374,116.215 ; 152.374,120.482 152.374,120.889 ; 152.374,121.879 152.374,122.565 ; 152.374,122.87 152.374,123.175 ; 152.374,123.962 152.374,124.368 ; 152.374,124.749 152.374,125.359 ; 152.374,125.74 152.374,126.248 ; 152.374,127.035 152.374,127.442 ; 152.374,128.839 152.374,129.626 ; 152.374,129.931 152.374,130.82 ; 152.399,113.624 152.399,114.513 ; 152.399,115.326 152.399,116.215 ; 152.399,120.482 152.399,120.889 ; 152.399,121.879 152.399,122.565 ; 152.399,122.87 152.399,123.175 ; 152.399,123.962 152.399,124.368 ; 152.399,124.749 152.399,125.359 ; 152.399,125.74 152.399,126.248 ; 152.399,127.035 152.399,127.442 ; 152.399,128.839 152.399,129.626 ; 152.399,129.931 152.399,130.82 ; 152.425,113.624 152.425,114.513 ; 152.425,115.326 152.425,116.215 ; 152.425,120.482 152.425,120.889 ; 152.425,121.879 152.425,122.565 ; 152.425,122.87 152.425,123.175 ; 152.425,123.962 152.425,124.368 ; 152.425,124.749 152.425,125.359 ; 152.425,125.74 152.425,126.248 ; 152.425,127.035 152.425,127.442 ; 152.425,128.839 152.425,129.626 ; 152.425,129.931 152.425,130.82 ; 152.45,113.624 152.45,114.513 ; 152.45,115.326 152.45,116.215 ; 152.45,120.482 152.45,120.889 ; 152.45,121.879 152.45,122.565 ; 152.45,122.87 152.45,123.175 ; 152.45,123.962 152.45,124.368 ; 152.45,124.749 152.45,125.359 ; 152.45,125.74 152.45,126.248 ; 152.45,127.035 152.45,127.442 ; 152.45,128.839 152.45,129.626 ; 152.45,129.931 152.45,130.82 ; 152.476,113.624 152.476,114.513 ; 152.476,115.326 152.476,116.215 ; 152.476,120.482 152.476,120.889 ; 152.476,121.879 152.476,122.565 ; 152.476,122.87 152.476,123.175 ; 152.476,123.962 152.476,124.368 ; 152.476,124.749 152.476,125.359 ; 152.476,125.74 152.476,126.248 ; 152.476,127.035 152.476,127.442 ; 152.476,128.839 152.476,129.626 ; 152.476,129.931 152.476,130.82 ; 152.501,113.624 152.501,114.513 ; 152.501,115.326 152.501,116.215 ; 152.501,120.482 152.501,120.889 ; 152.501,121.879 152.501,122.565 ; 152.501,122.87 152.501,123.175 ; 152.501,123.962 152.501,124.368 ; 152.501,124.749 152.501,125.359 ; 152.501,125.74 152.501,126.248 ; 152.501,127.035 152.501,127.442 ; 152.501,128.839 152.501,129.626 ; 152.501,129.931 152.501,130.82 ; 152.526,113.624 152.526,114.513 ; 152.526,115.326 152.526,116.215 ; 152.526,120.482 152.526,120.889 ; 152.526,121.879 152.526,122.565 ; 152.526,122.87 152.526,123.175 ; 152.526,123.962 152.526,124.368 ; 152.526,124.749 152.526,125.359 ; 152.526,125.74 152.526,126.248 ; 152.526,127.035 152.526,127.442 ; 152.526,128.839 152.526,129.626 ; 152.526,129.931 152.526,130.82 ; 152.552,113.624 152.552,114.513 ; 152.552,115.326 152.552,116.215 ; 152.552,120.685 152.552,121.981 ; 152.552,122.87 152.552,123.175 ; 152.552,123.962 152.552,124.368 ; 152.552,124.749 152.552,125.359 ; 152.552,125.74 152.552,126.934 ; 152.552,127.035 152.552,128.432 ; 152.552,128.839 152.552,130.82 ; 152.577,113.624 152.577,114.513 ; 152.577,115.326 152.577,116.215 ; 152.577,120.685 152.577,121.981 ; 152.577,122.87 152.577,123.175 ; 152.577,123.962 152.577,124.368 ; 152.577,124.749 152.577,125.359 ; 152.577,125.74 152.577,126.934 ; 152.577,127.035 152.577,128.432 ; 152.577,128.839 152.577,130.82 ; 152.603,113.624 152.603,114.513 ; 152.603,115.326 152.603,116.215 ; 152.603,120.685 152.603,121.981 ; 152.603,122.87 152.603,123.175 ; 152.603,123.962 152.603,124.368 ; 152.603,124.749 152.603,125.359 ; 152.603,125.74 152.603,126.934 ; 152.603,127.035 152.603,128.432 ; 152.603,128.839 152.603,130.82 ; 152.628,113.624 152.628,114.513 ; 152.628,115.326 152.628,116.215 ; 152.628,120.685 152.628,121.981 ; 152.628,122.87 152.628,123.175 ; 152.628,123.962 152.628,124.368 ; 152.628,124.749 152.628,125.359 ; 152.628,125.74 152.628,126.934 ; 152.628,127.035 152.628,128.432 ; 152.628,128.839 152.628,130.82 ; 152.653,113.624 152.653,114.513 ; 152.653,115.326 152.653,116.215 ; 152.653,120.889 152.653,121.879 ; 152.653,122.87 152.653,123.175 ; 152.653,123.962 152.653,124.368 ; 152.653,124.749 152.653,125.359 ; 152.653,126.045 152.653,126.934 ; 152.653,127.137 152.653,128.229 ; 152.653,129.118 152.653,129.931 ; 152.653,130.109 152.653,130.82 ; 152.679,113.624 152.679,114.513 ; 152.679,115.326 152.679,116.215 ; 152.679,120.889 152.679,121.879 ; 152.679,122.87 152.679,123.175 ; 152.679,123.962 152.679,124.368 ; 152.679,124.749 152.679,125.359 ; 152.679,126.045 152.679,126.934 ; 152.679,127.137 152.679,128.229 ; 152.679,129.118 152.679,129.931 ; 152.679,130.109 152.679,130.82 ; 152.704,113.624 152.704,114.513 ; 152.704,115.326 152.704,116.215 ; 152.704,120.889 152.704,121.879 ; 152.704,122.87 152.704,123.175 ; 152.704,123.962 152.704,124.368 ; 152.704,124.749 152.704,125.359 ; 152.704,126.045 152.704,126.934 ; 152.704,127.137 152.704,128.229 ; 152.704,129.118 152.704,129.931 ; 152.704,130.109 152.704,130.82 ; 152.73,113.624 152.73,114.513 ; 152.73,115.326 152.73,116.215 ; 152.73,120.889 152.73,121.879 ; 152.73,122.87 152.73,123.175 ; 152.73,123.962 152.73,124.368 ; 152.73,124.749 152.73,125.359 ; 152.73,126.045 152.73,126.934 ; 152.73,127.137 152.73,128.229 ; 152.73,129.118 152.73,129.931 ; 152.73,130.109 152.73,130.82 ; 152.755,113.624 152.755,114.513 ; 152.755,115.326 152.755,116.215 ; 152.755,120.889 152.755,121.879 ; 152.755,122.87 152.755,123.175 ; 152.755,123.962 152.755,124.368 ; 152.755,124.749 152.755,125.359 ; 152.755,126.045 152.755,126.934 ; 152.755,127.137 152.755,128.229 ; 152.755,129.118 152.755,129.931 ; 152.755,130.109 152.755,130.82 ; 152.78,113.624 152.78,114.513 ; 152.78,115.326 152.78,116.215 ; 152.78,120.889 152.78,121.879 ; 152.78,122.87 152.78,123.175 ; 152.78,123.962 152.78,124.368 ; 152.78,124.749 152.78,125.359 ; 152.78,126.045 152.78,126.934 ; 152.78,127.137 152.78,128.229 ; 152.78,129.118 152.78,129.931 ; 152.78,130.109 152.78,130.82 ; 152.806,113.624 152.806,114.513 ; 152.806,115.326 152.806,116.215 ; 152.806,120.889 152.806,121.879 ; 152.806,122.87 152.806,123.175 ; 152.806,123.962 152.806,124.368 ; 152.806,124.749 152.806,125.359 ; 152.806,126.045 152.806,126.934 ; 152.806,127.137 152.806,128.229 ; 152.806,129.118 152.806,129.931 ; 152.806,130.109 152.806,130.82 ; 152.831,113.624 152.831,114.513 ; 152.831,115.326 152.831,116.215 ; 152.831,120.889 152.831,121.879 ; 152.831,122.87 152.831,123.175 ; 152.831,123.962 152.831,124.368 ; 152.831,124.749 152.831,125.359 ; 152.831,126.045 152.831,126.934 ; 152.831,127.137 152.831,128.229 ; 152.831,129.118 152.831,129.931 ; 152.831,130.109 152.831,130.82 ; 152.857,113.624 152.857,114.513 ; 152.857,115.326 152.857,116.215 ; 152.857,120.889 152.857,121.879 ; 152.857,122.87 152.857,123.175 ; 152.857,123.962 152.857,124.368 ; 152.857,124.749 152.857,125.359 ; 152.857,126.045 152.857,126.934 ; 152.857,127.137 152.857,128.229 ; 152.857,129.118 152.857,129.931 ; 152.857,130.109 152.857,130.82 ; 152.882,113.624 152.882,114.513 ; 152.882,115.326 152.882,116.215 ; 152.882,120.889 152.882,121.879 ; 152.882,122.87 152.882,123.175 ; 152.882,123.962 152.882,124.368 ; 152.882,124.749 152.882,125.359 ; 152.882,126.045 152.882,126.934 ; 152.882,127.137 152.882,128.229 ; 152.882,129.118 152.882,129.931 ; 152.882,130.109 152.882,130.82 ; 152.907,113.624 152.907,114.513 ; 152.907,115.326 152.907,116.215 ; 152.907,120.889 152.907,121.879 ; 152.907,122.87 152.907,123.175 ; 152.907,123.962 152.907,124.368 ; 152.907,124.749 152.907,125.359 ; 152.907,126.045 152.907,126.934 ; 152.907,127.137 152.907,128.229 ; 152.907,129.118 152.907,129.931 ; 152.907,130.109 152.907,130.82 ; 152.933,113.624 152.933,114.513 ; 152.933,115.326 152.933,116.215 ; 152.933,120.889 152.933,121.879 ; 152.933,122.87 152.933,123.175 ; 152.933,123.962 152.933,124.368 ; 152.933,124.749 152.933,125.359 ; 152.933,126.045 152.933,126.934 ; 152.933,127.137 152.933,128.229 ; 152.933,129.118 152.933,129.931 ; 152.933,130.109 152.933,130.82 ; 152.958,113.624 152.958,114.513 ; 152.958,115.326 152.958,116.215 ; 152.958,120.889 152.958,121.879 ; 152.958,122.87 152.958,123.175 ; 152.958,123.962 152.958,124.368 ; 152.958,124.749 152.958,125.359 ; 152.958,126.045 152.958,126.934 ; 152.958,127.137 152.958,128.229 ; 152.958,129.118 152.958,129.931 ; 152.958,130.109 152.958,130.82 ; 152.984,113.624 152.984,114.513 ; 152.984,115.326 152.984,116.215 ; 152.984,120.889 152.984,121.879 ; 152.984,122.87 152.984,123.175 ; 152.984,123.962 152.984,124.368 ; 152.984,124.749 152.984,125.359 ; 152.984,126.045 152.984,126.934 ; 152.984,127.137 152.984,128.229 ; 152.984,129.118 152.984,129.931 ; 152.984,130.109 152.984,130.82 ; 153.009,113.624 153.009,114.513 ; 153.009,115.326 153.009,116.215 ; 153.009,120.889 153.009,121.879 ; 153.009,122.87 153.009,123.175 ; 153.009,123.962 153.009,124.368 ; 153.009,124.749 153.009,125.359 ; 153.009,126.045 153.009,126.934 ; 153.009,127.137 153.009,128.229 ; 153.009,129.118 153.009,129.931 ; 153.009,130.109 153.009,130.82 ; 153.034,113.624 153.034,114.513 ; 153.034,115.326 153.034,116.215 ; 153.034,120.889 153.034,121.879 ; 153.034,122.87 153.034,123.175 ; 153.034,123.962 153.034,124.368 ; 153.034,124.749 153.034,125.359 ; 153.034,126.045 153.034,126.934 ; 153.034,127.137 153.034,128.229 ; 153.034,129.118 153.034,129.931 ; 153.034,130.109 153.034,130.82 ; 153.06,113.624 153.06,114.513 ; 153.06,115.326 153.06,116.215 ; 153.06,120.889 153.06,121.879 ; 153.06,122.87 153.06,123.175 ; 153.06,123.962 153.06,124.368 ; 153.06,124.749 153.06,125.359 ; 153.06,126.045 153.06,126.934 ; 153.06,127.137 153.06,128.229 ; 153.06,129.118 153.06,129.931 ; 153.06,130.109 153.06,130.82 ; 153.085,113.624 153.085,114.513 ; 153.085,115.326 153.085,116.215 ; 153.111,113.624 153.111,114.513 ; 153.111,115.326 153.111,116.215 ; 153.136,113.624 153.136,114.513 ; 153.136,115.326 153.136,116.215 ; 153.161,113.624 153.161,114.513 ; 153.161,115.326 153.161,116.215 ; 153.187,113.624 153.187,114.513 ; 153.187,115.326 153.187,116.215 ; 153.212,113.624 153.212,114.513 ; 153.212,115.326 153.212,116.215 ; 153.238,113.624 153.238,114.513 ; 153.238,115.326 153.238,116.215 ; 153.263,113.624 153.263,114.513 ; 153.263,115.326 153.263,116.215 ; 153.288,113.624 153.288,114.513 ; 153.288,115.326 153.288,116.215 ; 153.314,113.624 153.314,114.513 ; 153.314,115.326 153.314,116.215 ; 153.339,113.624 153.339,114.513 ; 153.339,115.326 153.339,116.215 ; 153.365,113.624 153.365,114.513 ; 153.365,115.326 153.365,116.215 ; 153.39,113.624 153.39,114.513 ; 153.39,115.326 153.39,116.215 ; 153.415,113.624 153.415,114.513 ; 153.415,115.326 153.415,116.215 ; 153.441,113.624 153.441,114.513 ; 153.441,115.326 153.441,116.215 ; 153.466,113.624 153.466,114.513 ; 153.466,115.326 153.466,116.215 ; 153.492,113.624 153.492,114.513 ; 153.492,115.326 153.492,116.215 ; 153.517,113.624 153.517,114.513 ; 153.517,115.326 153.517,116.215 ; 153.542,113.624 153.542,114.513 ; 153.542,115.326 153.542,116.215 ; 153.568,113.624 153.568,114.513 ; 153.568,115.326 153.568,116.215 ; 153.593,113.624 153.593,114.513 ; 153.593,115.326 153.593,116.215 ; 153.619,113.624 153.619,114.513